# Altium PCB schematic_sn74hc595n.PcbDoc
Units mm, origin at the board's own origin, x right, y up, seen from the top; angles counter-clockwise.
Board outline 150 x 200 mm, 2 copper layers (Top Layer, Bottom Layer), stack 0.325 mm thick; 128 components, 196 nets, 444 pads, 0 vias.
Unrouted connection lines stored in the file: 234.
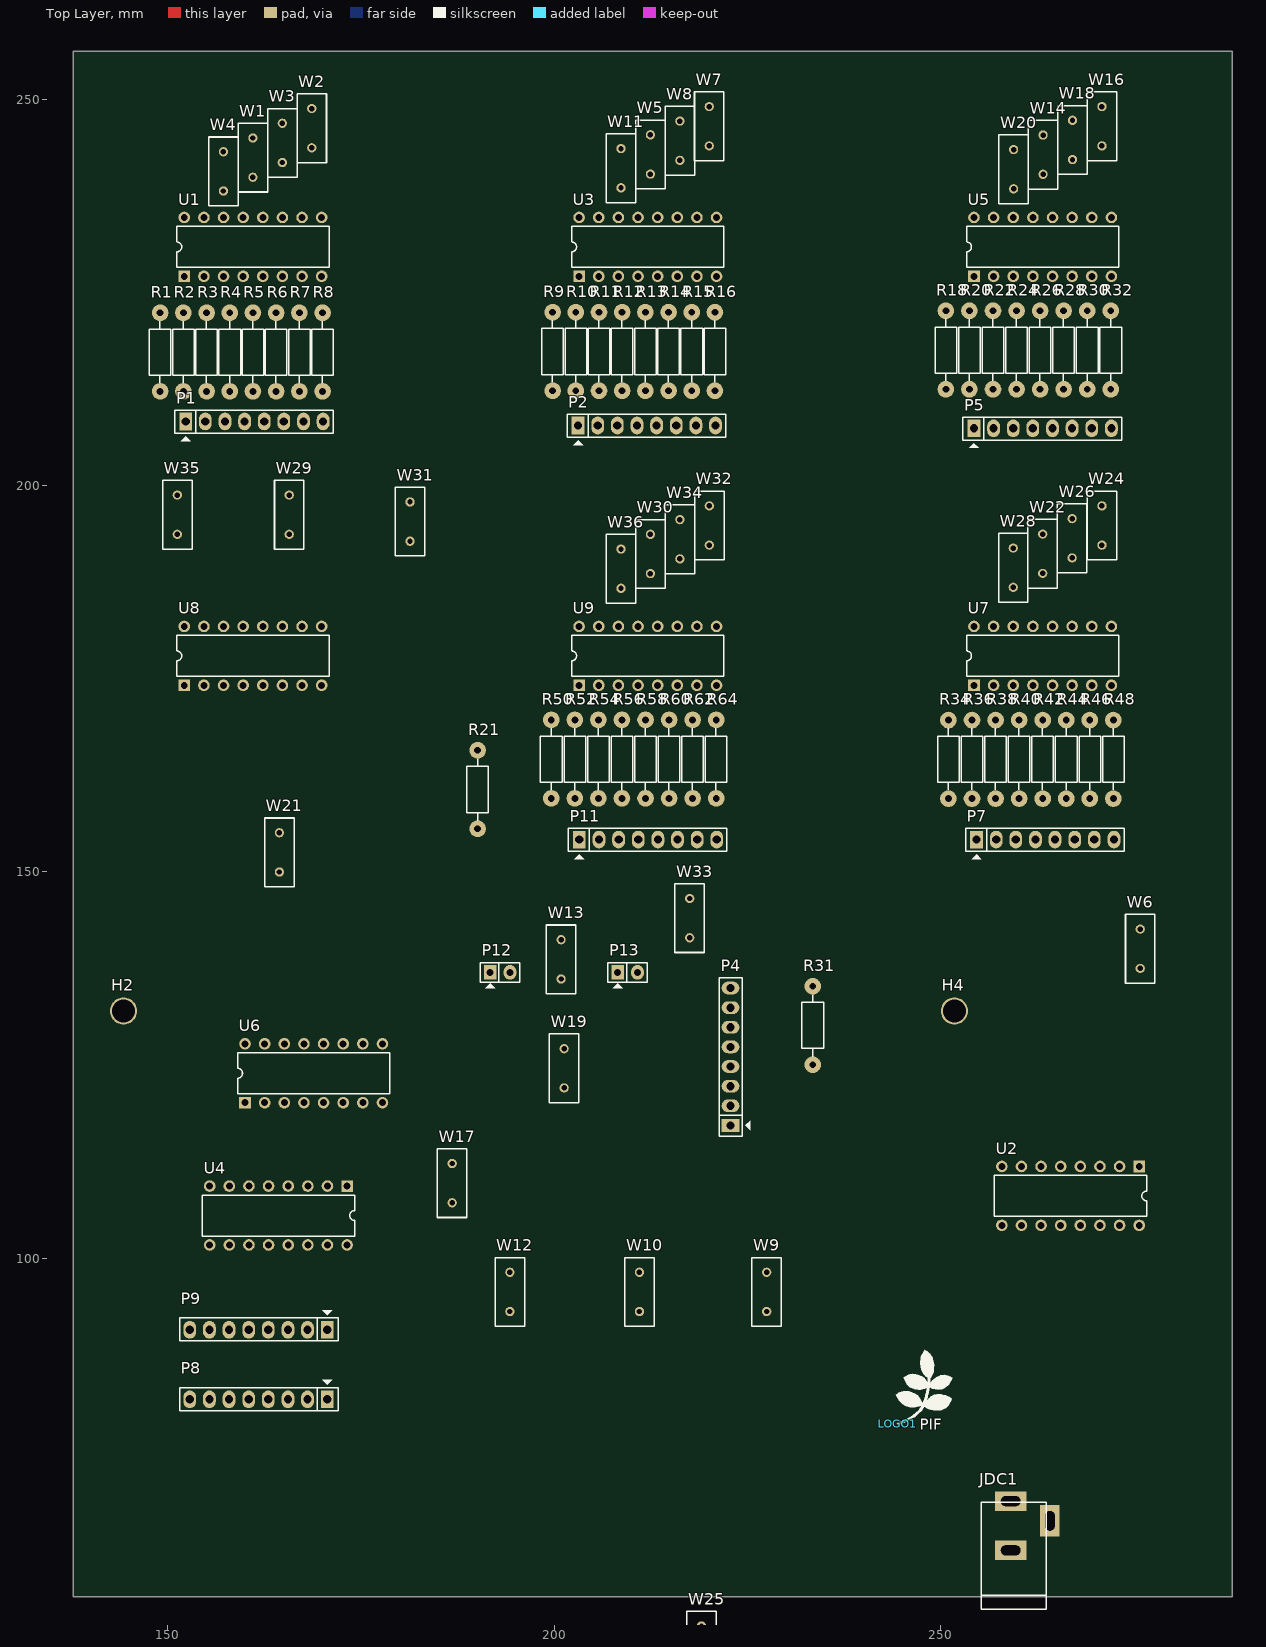
[diagram p0: Top Layer view]
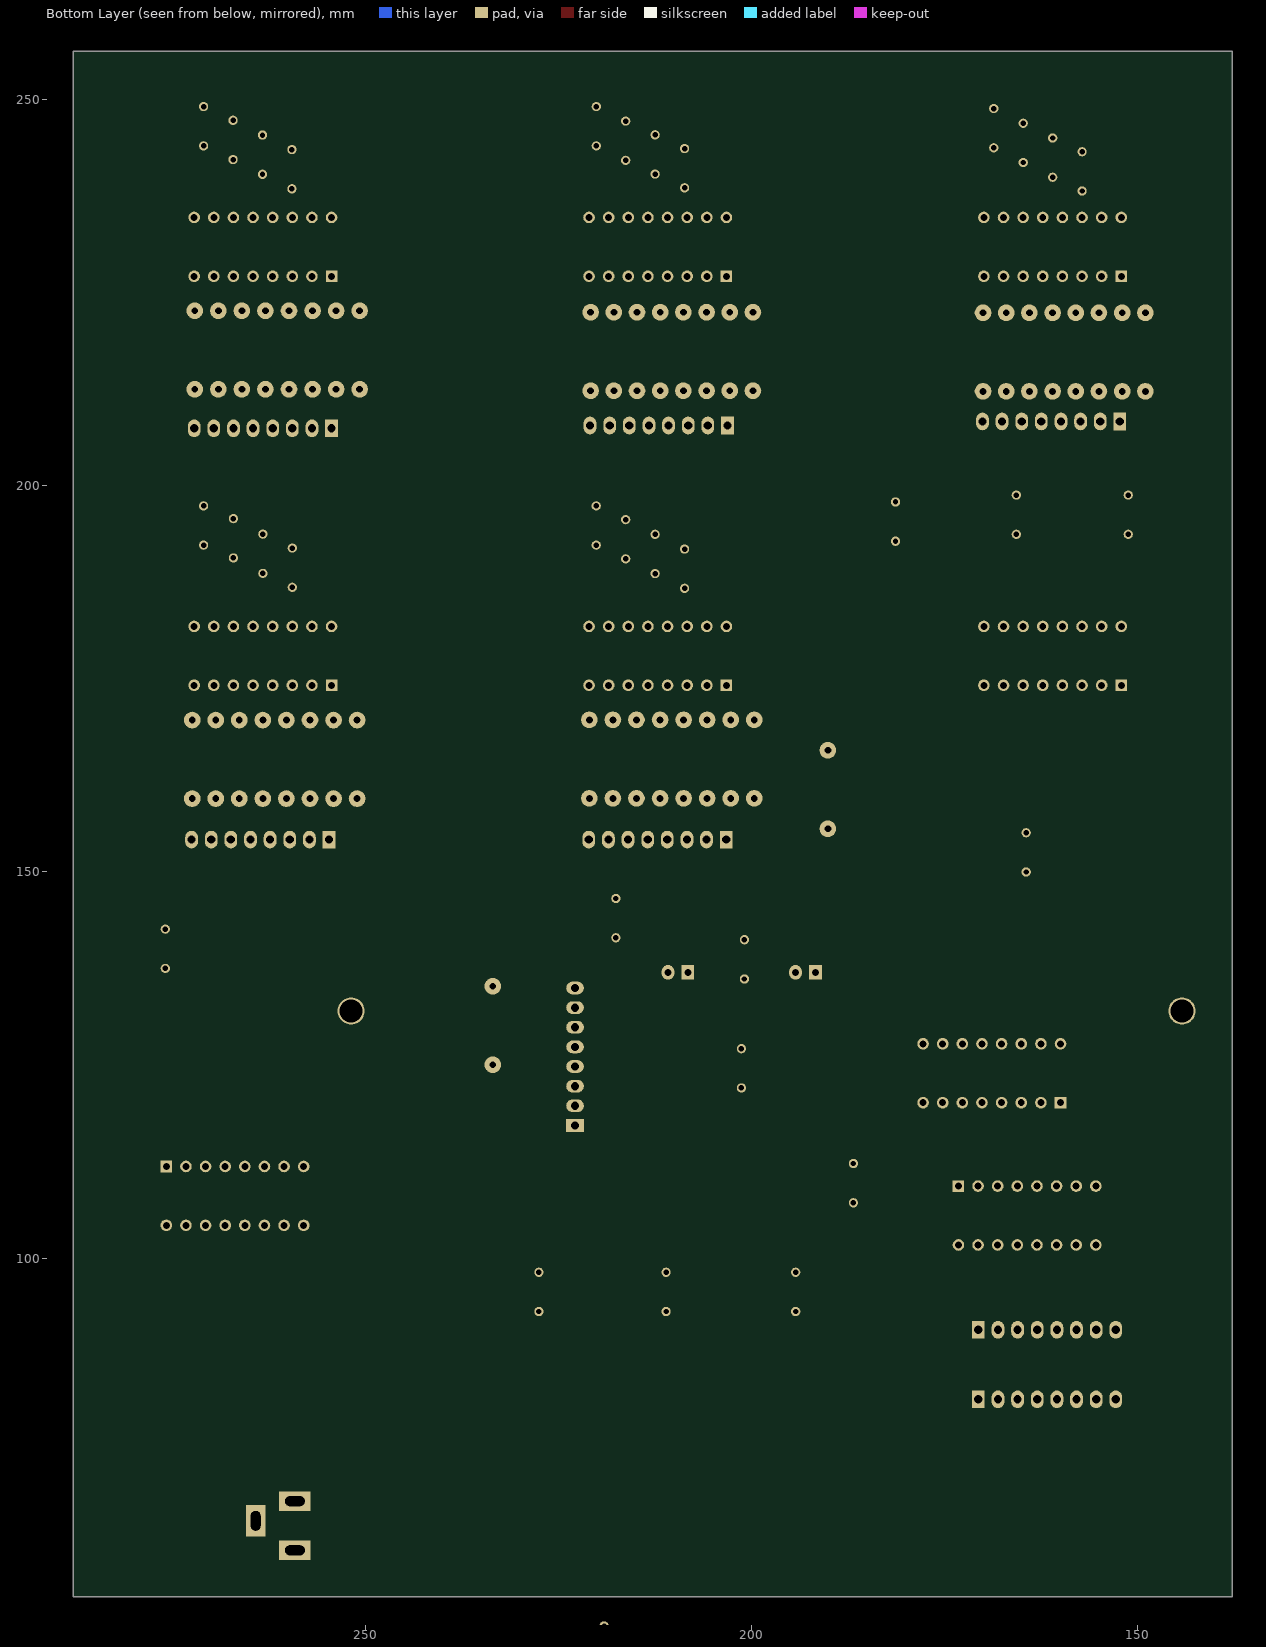
[diagram p1: Bottom Layer view, seen from below]

## Layer stack, top to bottom
Top Solder: solder mask 0.0102, Solder Resist, Dk 3.5
Top Layer: signal copper 0.0356
Dielectric 1: core 0.254, FR-4, Dk 4.2
Bottom Layer: signal copper 0.0356

## Board outline
137.775,56.198 287.775,56.198 287.775,256.198 137.775,256.198

## Design rules (kind name [scope] priority, off if disabled: settings)
Clearance [All] p1: gap=0.381 ignorepadtopadclearanceinfootprint=FALSE
PolygonConnect [All] p1: connectstyle=Relief reliefconductorwidth=0.254 reliefentries=4 polygonreliefangle="90 Angle" airgapwidth=0.254
RoutingVias [All] p1: holewidth=0.711 width=1.27 viastyle="Through Hole" minholewidth=0.711 minwidth=1.27 maxholewidth=0.711 maxwidth=1.27
SolderMaskExpansion [All] p1: expansion=0.102
Width [All] p1: maxlimit=1.27 minlimit=0.381 preferedwidth=0.762 checkconnectedcopper=TRUE
30 further rules are at their usual default settings.

## Components (designator, comment, footprint, x,y, rotation, side; value= is the part's Value field where it differs from the comment)
H1 "Hole" "LO KHOAN 3MM" 127.508,253.873 r0 top
H2 "Hole" "LO KHOAN 3MM" 144.3,132.004 r0 top
H3 "Hole" "LO KHOAN 3MM" 296.164,244.094 r0 top
H4 "Hole" "LO KHOAN 3MM" 251.8,132.004 r0 top
JDC1 "Jack DC" DC-IN 261.62,65.405 r90 top value="Jac DC"
LOGO1 "LOGO PIF" "PIF LOGO BIG SSTOP" 244.196,78.257 r0 top
P1 "Header 8" JP8 152.342,208.28 r0 top
P2 "Header 8" JP8 203.112,207.758 r0 top
P3 "Header 8" JP8 473.353,194.045 r90 top
P4 "Header 8" JP8 222.833,117.196 r90 top
P5 "Header 8" JP8 254.33,207.391 r0 top
P6 "Header 8" JP8 609.219,1.511 r90 top
P7 "Header 8" JP8 254.664,154.178 r0 top
P8 "Header 8" JP8 170.65,81.759 r180 top
P9 "Header 8" JP8 170.65,90.759 r180 top
P10 "Header 8" JP8 322.555,110.045 r90 top
P11 "Header 8" JP8 203.276,154.178 r0 top
P12 "Header 2" JP2 191.735,137.004 r0 top
P13 "Header 2" JP2 208.235,137.004 r0 top
R1 "RESISTOR" "RES 1/2W" 149.036,222.339 r270 top value=220
R2 "RESISTOR" "RES 1/2W" 152.036,222.339 r270 top value=220
R3 "RESISTOR" "RES 1/2W" 155.046,222.339 r270 top value=220
R4 "RESISTOR" "RES 1/2W" 158.046,222.339 r270 top value=220
R5 "RESISTOR" "RES 1/2W" 161.046,222.339 r270 top value=220
R6 "RESISTOR" "RES 1/2W" 164.046,222.339 r270 top value=220
R7 "RESISTOR" "RES 1/2W" 167.046,222.339 r270 top value=220
R8 "RESISTOR" "RES 1/2W" 170.046,222.339 r270 top value=220
R9 "RESISTOR" "RES 1/2W" 199.816,222.418 r270 top value=220
R10 "RESISTOR" "RES 1/2W" 202.816,222.418 r270 top value=220
R11 "RESISTOR" "RES 1/2W" 205.816,222.418 r270 top value=220
R12 "RESISTOR" "RES 1/2W" 208.816,222.418 r270 top value=220
R13 "RESISTOR" "RES 1/2W" 211.816,222.418 r270 top value=220
R14 "RESISTOR" "RES 1/2W" 214.816,222.418 r270 top value=220
R15 "RESISTOR" "RES 1/2W" 217.816,222.418 r270 top value=220
R16 "RESISTOR" "RES 1/2W" 220.816,222.418 r270 top value=220
R17 "RESISTOR" "RES 1/2W" 416.687,166.484 r90 top value=220
R18 "RESISTOR" "RES 1/2W" 250.698,222.604 r270 top value=220
R19 "RESISTOR" "RES 1/2W" 433.959,183.248 r90 top value=220
R20 "RESISTOR" "RES 1/2W" 253.746,222.604 r270 top value=220
R21 "RESISTOR" "RES 1/2W" 190.119,155.575 r90 top value=220
R22 "RESISTOR" "RES 1/2W" 256.794,222.604 r270 top value=220
R23 "RESISTOR" "RES 1/2W" 373.074,201.894 r90 top value=220
R24 "RESISTOR" "RES 1/2W" 259.842,222.604 r270 top value=220
R25 "RESISTOR" "RES 1/2W" 349.934,201.894 r90 top value=220
R26 "RESISTOR" "RES 1/2W" 262.89,222.604 r270 top value=220
R27 "RESISTOR" "RES 1/2W" 338.25,201.894 r90 top value=220
R28 "RESISTOR" "RES 1/2W" 265.938,222.604 r270 top value=220
R29 "RESISTOR" "RES 1/2W" 326.566,201.894 r90 top value=220
R30 "RESISTOR" "RES 1/2W" 268.986,222.604 r270 top value=220
R31 "RESISTOR" "RES 1/2W" 233.475,125.045 r90 top value=220
R32 "RESISTOR" "RES 1/2W" 272.034,222.604 r270 top value=220
R33 "RESISTOR" "RES 1/2W" 643.128,117.894 r90 top value=220
R34 "RESISTOR" "RES 1/2W" 251.032,169.645 r270 top value=220
R35 "RESISTOR" "RES 1/2W" 619.76,117.894 r90 top value=220
R36 "RESISTOR" "RES 1/2W" 254.08,169.645 r270 top value=220
R37 "RESISTOR" "RES 1/2W" 596.367,117.894 r90 top value=220
R38 "RESISTOR" "RES 1/2W" 257.128,169.645 r270 top value=220
R39 "RESISTOR" "RES 1/2W" 584.683,117.894 r90 top value=220
R40 "RESISTOR" "RES 1/2W" 260.176,169.645 r270 top value=220
R41 "RESISTOR" "RES 1/2W" 561.823,117.894 r90 top value=220
R42 "RESISTOR" "RES 1/2W" 263.224,169.645 r270 top value=220
R43 "RESISTOR" "RES 1/2W" 550.139,117.894 r90 top value=220
R44 "RESISTOR" "RES 1/2W" 266.272,169.645 r270 top value=220
R45 "RESISTOR" "RES 1/2W" 538.455,117.894 r90 top value=220
R46 "RESISTOR" "RES 1/2W" 269.32,169.645 r270 top value=220
R47 "RESISTOR" "RES 1/2W" 526.771,117.894 r90 top value=220
R48 "RESISTOR" "RES 1/2W" 272.368,169.645 r270 top value=220
R49 "RESISTOR" "RES 1/2W" 454.025,117.602 r90 top value=220
R50 "RESISTOR" "RES 1/2W" 199.644,169.672 r270 top value=220
R51 "RESISTOR" "RES 1/2W" 450.977,117.602 r90 top value=220
R52 "RESISTOR" "RES 1/2W" 202.692,169.672 r270 top value=220
R53 "RESISTOR" "RES 1/2W" 447.802,117.475 r90 top value=220
R54 "RESISTOR" "RES 1/2W" 205.74,169.672 r270 top value=220
R55 "RESISTOR" "RES 1/2W" 401.523,117.894 r90 top value=220
R56 "RESISTOR" "RES 1/2W" 208.788,169.672 r270 top value=220
R57 "RESISTOR" "RES 1/2W" 378.282,117.894 r90 top value=220
R58 "RESISTOR" "RES 1/2W" 211.836,169.672 r270 top value=220
R59 "RESISTOR" "RES 1/2W" 366.725,117.894 r90 top value=220
R60 "RESISTOR" "RES 1/2W" 214.884,169.672 r270 top value=220
R61 "RESISTOR" "RES 1/2W" 344.983,117.894 r90 top value=220
R62 "RESISTOR" "RES 1/2W" 217.932,169.672 r270 top value=220
R63 "RESISTOR" "RES 1/2W" 333.426,117.894 r90 top value=220
R64 "RESISTOR" "RES 1/2W" 220.98,169.672 r270 top value=220
U1 "SN74HC595N" N016 161.046,230.869 r0 top
U2 "SN74HC595N" N016 266.827,108.077 r180 top
U3 "SN74HC595N" N016 212.135,230.869 r0 top
U4 "SN74HC595N" N016 164.338,105.537 r180 top
U5 "SN74HC595N" N016 263.224,230.869 r0 top
U6 "SN74HC595N" N016 168.91,123.952 r0 top
U7 "SN74HC595N" N016 263.224,177.954 r0 top
U8 "SN74HC595N" N016 161.046,177.954 r0 top
U9 "SN74HC595N" N016 212.135,177.954 r0 top
W1 "Jumper" RAD-0.2 161.036,242.416 r270 top
W2 "Jumper" RAD-0.2 168.656,246.226 r270 top
W3 "Jumper" RAD-0.2 164.846,244.321 r270 top
W4 "Jumper" RAD-0.2 157.226,240.638 r270 top
W5 "Jumper" RAD-0.2 212.471,242.824 r270 top
W6 "Jumper" RAD-0.2 275.844,140.054 r90 top
W7 "Jumper" RAD-0.2 220.08,246.48 r270 top
W8 "Jumper" RAD-0.2 216.281,244.602 r270 top
W9 "Jumper" RAD-0.2 227.51,95.658 r90 top
W10 "Jumper" RAD-0.2 211.051,95.658 r90 top
W11 "Jumper" RAD-0.2 208.661,241.046 r270 top
W12 "Jumper" RAD-0.2 194.287,95.658 r90 top
W13 "Jumper" RAD-0.2 200.914,138.684 r90 top
W14 "Jumper" RAD-0.2 263.271,242.797 r270 top
W15 "Jumper" RAD-0.2 330.454,154.673 r90 top
W16 "Jumper" RAD-0.2 270.891,246.48 r270 top
W17 "Jumper" RAD-0.2 186.817,109.728 r270 top
W18 "Jumper" RAD-0.2 267.081,244.702 r270 top
W19 "Jumper" RAD-0.2 201.306,124.587 r90 top
W20 "Jumper" RAD-0.2 259.461,240.919 r270 top
W21 "Jumper" RAD-0.2 164.465,152.527 r90 top
W22 "Jumper" RAD-0.2 263.224,191.162 r90 top
W23 "Jumper" RAD-0.2 279.527,32.739 r90 top
W24 "Jumper" RAD-0.2 270.891,194.818 r270 top
W25 "Jumper" RAD-0.2 219.075,49.884 r90 top
W26 "Jumper" RAD-0.2 267.034,193.167 r270 top
W27 "Jumper" RAD-0.2 164.084,38.581 r90 top
W28 "Jumper" RAD-0.2 259.414,189.357 r270 top
W29 "Jumper" RAD-0.2 165.735,196.215 r270 top
W30 "Jumper" RAD-0.2 212.471,191.135 r270 top
W31 "Jumper" RAD-0.2 181.367,195.326 r90 top
W32 "Jumper" RAD-0.2 220.091,194.818 r270 top
W33 "Jumper" RAD-0.2 217.551,144.018 r90 top
W34 "Jumper" RAD-0.2 216.281,193.04 r270 top
W35 "Jumper" RAD-0.2 151.257,196.215 r90 top
W36 "Jumper" RAD-0.2 208.661,189.23 r270 top

## Footprints (in the part's own frame and the unit in brackets; to place one, negate y for a bottom-side part, rotate by r counter-clockwise, add the part's x,y. Pads: shape width x height; smd on the part's side, far side on the other; paste and mask are expansions set on the pad)
DC-IN [mil] "Jac DC input"
  rect 100x160 hole 50 slot 100 at 90 deg: 1(125,100) 2(-125,100)
  rect 160x100 hole 50 slot 100 at 0 deg: 3(25,-100)
  silkscreen extent -425,-80 120,250, body extent -410,-105 134,269, height 434
JP2 [mil]
  rect 65x75 hole 36: 1(0,0)
  oval 65x75 hole 36: 2(101,0)
  silkscreen extent -50,-81 150,50, body extent -48,-50 148,48, height 323
JP8 [mil] "JP8"
  rect 65x90 hole 42: 1(0,0)
  oval 65x90 hole 42: 2(100,0) 3(200,0) 4(300,0) 5(400,0) 6(500,0) 7(600,0) 8(700,0)
  silkscreen extent -56,-100 752,57, body extent -48,-50 748,48, height 323
"LO KHOAN 3MM" [mil]
  round 138 hole 118.1: 1(0,0)
N016 [mm] "DIP; 16 Leads; Row Spacing 7.62 mm; Pitch 2.54 mm"
  rect 1.5x1.5 hole 0.9: 1(-8.89,-3.81)
  round 1.5 hole 0.9: 2(-6.35,-3.81) 3(-3.81,-3.81) 4(-1.27,-3.81) 5(1.27,-3.81) 6(3.81,-3.81) 7(6.35,-3.81) 8(8.89,-3.81) 9(8.89,3.81) 10(6.35,3.81) 11(3.81,3.81) 12(1.27,3.81) 13(-1.27,3.81) 14(-3.81,3.81) 15(-6.35,3.81) 16(-8.89,3.81)
  silkscreen extent -9.85,-2.65 9.85,2.65
"PIF LOGO BIG SSTOP" [mil]
  rect 15x15 smd: 1(11,14)
  silkscreen extent 0,14 289,389
RAD-0.2 [mm] "Radial Cap, Thru-Hole; 2 Leads; 0.2 in Pin Spacing"
  round 1.2 hole 0.7: 1(-2.54,0) 2(2.54,0)
  silkscreen extent -4.44,-1.91 4.44,1.91
"RES 1/2W" [mil] "R 1/2W, 2 pin, 300mil"
  round 85 hole 35: 1(0,0) 2(400,0)
  silkscreen extent 42,-55 356,55, body extent -12,-45 414,49, height 91

## Part data
H1 H2 H3 H4: "Hole 3mm"
JDC1: "Jack DC input"
P1 P2 P3 P4 P5 P6 P7 P8 P9 P10 P11: "Header, 8-Pin", LatestRevisionDate=17-Jul-2002, LatestRevisionNote="Re-released for DXP Platform.", Publisher="Altium Limited"
P12 P13: "Header, 2-Pin", LatestRevisionDate=17-Jul-2002, LatestRevisionNote="Re-released for DXP Platform.", Publisher="Altium Limited"
R1 R2 R3 R4 R5 R6 R7 R8 R9 R10 R11 R12 R13 R14 R15 R16 R17 R18 R19 R20 R21 R22 R23 R24 R25 R26 R27 R28 R29 R30 R31 R32 R33 R34 R35 R36 R37 R38 R39 R40 R41 R42 R43 R44 R45 R46 R47 R48 R49 R50 R51 R52 R53 R54 R55 R56 R57 R58 R59 R60 R61 R62 R63 R64: "Resistor"
U1 U2 U3 U4 U5 U6 U7 U8 U9: "8-Bit Shift Register with 3-State Output Registers", Code_JEDEC=MS-001-BB, ComponentLink1Description="Manufacturer Link", ComponentLink1URL=http://www.ti.com/, ComponentLink2Description=Datasheet, ComponentLink2URL=http://www-s.ti.com/sc/ds/sn74hc595.pdf, DatasheetVersion=May-1997, LatestRevisionDate=04-Mar-2005, LatestRevisionNote="Stylized 3D Model Added.", PackageDescription="DIP; 16 Leads; Row Spacing 7.62 mm; Pitch 2.54 mm", PackageReference=N016, PackageVersion=Oct-1995, Published=8-Jun-2000, Publisher="Altium Limited"
W1 W2 W3 W4 W5 W6 W7 W8 W9 W10 W11 W12 W13 W14 W15 W16 W17 W18 W19 W20 W21 W22 W23 W24 W25 W26 W27 W28 W29 W30 W31 W32 W33 W34 W35 W36: "Jumper Wire", LatestRevisionDate=17-Jul-2002, LatestRevisionNote="Re-released for DXP Platform.", PackageDescription="Radial Cap, Thru-Hole; 2 Leads; 0.2 in Pin Spacing", PackageReference=RAD-0.2, Published=24-Mar-1999, Publisher="Altium Limited"

## Nets (pads, with @x,y where several pads share a name; then routed paths per layer and width w, separated by ;. In a path a pad name is that pad's centre, name@x,y a point inside that pad or via, vN(x,y) a via of type N, cw(c..) or ccw(c..) an arc to the next point about the centre after c; other vN are vias at no path point)
5V: JDC1.1 P8.1 U1.16 U2.16 U3.16 U4.16 U5.16 U6.16 U7.16 U8.16 U9.16 W2.1 W7.1 W10.2 W15.1 W16.1 W23.1 W24.1 W31.1 W32.1
GND: JDC1.2 P8.2 P9.5 P12.1 U1.8 U1.13 U2.8 U2.13 U3.8 U3.13 U4.8 U4.13 U5.8 U5.13 U6.8 U6.13 U7.8 U7.13 U8.8 U8.13 U9.8 U9.13
NetP1_1: P1.1 R1.2
NetP1_2: P1.2 R2.2
NetP1_3: P1.3 R3.2
NetP1_4: P1.4 R4.2
NetP1_5: P1.5 R5.2
NetP1_6: P1.6 R6.2
NetP1_7: P1.7 R7.2
NetP1_8: P1.8 R8.2
NetP2_1: P2.1 R9.2
NetP2_2: P2.2 R10.2
NetP2_3: P2.3 R11.2
NetP2_4: P2.4 R12.2
NetP2_5: P2.5 R13.2
NetP2_6: P2.6 R14.2
NetP2_7: P2.7 R15.2
NetP2_8: P2.8 R16.2
NetP3_1: P3.1
NetP3_2: P3.2
NetP3_3: P3.3
NetP3_4: P3.4
NetP3_5: P3.5
NetP3_6: P3.6
NetP3_7: P3.7
NetP3_8: P3.8
NetP4_1: P4.1 R17.2
NetP4_2: P4.2 R19.2
NetP4_3: P4.3 R21.2
NetP4_4: P4.4 R23.2
NetP4_5: P4.5 R25.2
NetP4_6: P4.6 R27.2
NetP4_7: P4.7 R29.2
NetP4_8: P4.8 R31.2
NetP5_1: P5.1 R18.2
NetP5_2: P5.2 R20.2
NetP5_3: P5.3 R22.2
NetP5_4: P5.4 R24.2
NetP5_5: P5.5 R26.2
NetP5_6: P5.6 R28.2
NetP5_7: P5.7 R30.2
NetP5_8: P5.8 R32.2
NetP6_1: P6.1 R33.2
NetP6_2: P6.2 R35.2
NetP6_3: P6.3 R37.2
NetP6_4: P6.4 R39.2
NetP6_5: P6.5 R41.2
NetP6_6: P6.6 R43.2
NetP6_7: P6.7 R45.2
NetP6_8: P6.8 R47.2
NetP7_1: P7.1 R34.2
NetP7_2: P7.2 R36.2
NetP7_3: P7.3 R38.2
NetP7_4: P7.4 R40.2
NetP7_5: P7.5 R42.2
NetP7_6: P7.6 R44.2
NetP7_7: P7.7 R46.2
NetP7_8: P7.8 R48.2
NetP10_1: P10.1 R49.2
NetP10_2: P10.2 R51.2
NetP10_3: P10.3 R53.2
NetP10_4: P10.4 R55.2
NetP10_5: P10.5 R57.2
NetP10_6: P10.6 R59.2
NetP10_7: P10.7 R61.2
NetP10_8: P10.8 R63.2
NetP11_1: P11.1 R50.2
NetP11_2: P11.2 R52.2
NetP11_3: P11.3 R54.2
NetP11_4: P11.4 R56.2
NetP11_5: P11.5 R58.2
NetP11_6: P11.6 R60.2
NetP11_7: P11.7 R62.2
NetP11_8: P11.8 R64.2
NetQ1_B: U2.7
NetQ2_B: U2.6
NetQ3_B: U2.5
NetQ4_B: U2.4
NetQ5_B: U2.3
NetQ6_B: U2.2
NetQ7_B: U2.1
NetQ8_B: U2.15
NetR1_1: R1.1 U1.15
NetR2_1: R2.1 U1.1
NetR3_1: R3.1 U1.2
NetR4_1: R4.1 U1.3
NetR5_1: R5.1 U1.4
NetR6_1: R6.1 U1.5
NetR7_1: R7.1 U1.6
NetR8_1: R8.1 U1.7
NetR9_1: R9.1 U3.15
NetR10_1: R10.1 U3.1
NetR11_1: R11.1 U3.2
NetR12_1: R12.1 U3.3
NetR13_1: R13.1 U3.4
NetR14_1: R14.1 U3.5
NetR15_1: R15.1 U3.6
NetR16_1: R16.1 U3.7
NetR17_1: R17.1 U4.15
NetR18_1: R18.1 U5.15
NetR19_1: R19.1 U4.1
NetR20_1: R20.1 U5.1
NetR21_1: R21.1 U4.2
NetR22_1: R22.1 U5.2
NetR23_1: R23.1 U4.3
NetR24_1: R24.1 U5.3
NetR25_1: R25.1 U4.4
NetR26_1: R26.1 U5.4
NetR27_1: R27.1 U4.5
NetR28_1: R28.1 U5.5
NetR29_1: R29.1 U4.6
NetR30_1: R30.1 U5.6
NetR31_1: R31.1 U4.7
NetR32_1: R32.1 U5.7
NetR33_1: R33.1 U6.15
NetR34_1: R34.1 U7.15
NetR35_1: R35.1 U6.1
NetR36_1: R36.1 U7.1
NetR37_1: R37.1 U6.2
NetR38_1: R38.1 U7.2
NetR39_1: R39.1 U6.3
NetR40_1: R40.1 U7.3
NetR41_1: R41.1 U6.4
NetR42_1: R42.1 U7.4
NetR43_1: R43.1 U6.5
NetR44_1: R44.1 U7.5
NetR45_1: R45.1 U6.6
NetR46_1: R46.1 U7.6
NetR47_1: R47.1 U6.7
NetR48_1: R48.1 U7.7
NetR49_1: R49.1 U8.15
NetR50_1: R50.1 U9.15
NetR51_1: R51.1 U8.1
NetR52_1: R52.1 U9.1
NetR53_1: R53.1 U8.2
NetR54_1: R54.1 U9.2
NetR55_1: R55.1 U8.3
NetR56_1: R56.1 U9.3
NetR57_1: R57.1 U8.4
NetR58_1: R58.1 U9.4
NetR59_1: R59.1 U8.5
NetR60_1: R60.1 U9.5
NetR61_1: R61.1 U8.6
NetR62_1: R62.1 U9.6
NetR63_1: R63.1 U8.7
NetR64_1: R64.1 U9.7
NetU1_9: U1.9 W11.1
NetU1_10: U1.10 W2.2
NetU1_11: U1.11 W3.2
NetU1_12: U1.12 W1.2
NetU1_14: U1.14 W4.2
NetU2_10: U2.10 W10.1
NetU2_11: U2.11 W9.1
NetU2_12: U2.12 W12.1
NetU2_14: U2.14 W6.1
NetU3_9: U3.9 W20.1
NetU3_10: U3.10 W7.2
NetU3_11: U3.11 W8.2
NetU3_12: U3.12 W5.2
NetU3_14: U3.14 W11.2
NetU4_9: U4.9 W6.2
NetU4_10: U4.10 W15.2
NetU4_11: U4.11 W17.2
NetU4_12: U4.12 W13.2
NetU4_14: U4.14 W19.2
NetU5_9: U5.9 W28.1
NetU5_10: U5.10 W16.2
NetU5_11: U5.11 W18.2
NetU5_12: U5.12 W14.2
NetU5_14: U5.14 W20.2
NetU6_9: U6.9 W19.1
NetU6_10: U6.10 W23.2
NetU6_11: U6.11 W25.2
NetU6_12: U6.12 W21.2
NetU6_14: U6.14 W27.2
NetU7_9: U7.9 W36.1
NetU7_10: U7.10 W24.2
NetU7_11: U7.11 W26.2
NetU7_12: U7.12 W22.2
NetU7_14: U7.14 W28.2
NetU8_9: U8.9 W27.1
NetU8_10: U8.10 W31.2
NetU8_11: U8.11 W33.2
NetU8_12: U8.12 W29.2
NetU8_14: U8.14 W35.2
NetU9_9: U9.9 W35.1
NetU9_10: U9.10 W32.2
NetU9_11: U9.11 W34.2
NetU9_12: U9.12 W30.2
NetU9_14: U9.14 W36.2
PA1/BUTTON: P8.5 P12.2
PA5: P9.1 W3.1 W8.1 W9.2 W17.1 W18.1 W25.1 W26.1 W33.1 W34.1
PA6: P9.2 W1.1 W5.1 W12.2 W13.1 W14.1 W21.1 W22.1 W29.1 W30.1
PA7: P9.3 W4.1
PA9/TX: P9.7 P13.1
PA10/RX: P9.8 P13.2
pads on no net: H1.1 H2.1 H3.1 H4.1 JDC1.3 LOGO1.1 P8.3 P8.4 P8.6 P8.7 P8.8 P9.4 P9.6 U2.9

## Silkscreen, mask and mechanical layers (free items; w line width, h text height)
Mechanical 1:
  the board outline again, w0.127

## Text inside footprints (layer, text, board x,y; h text height)
LOGO1: Top Overlay "PIF" at 247.286,77.826 h1.43